# EAGLE board module (EAGLE 9.3.0)
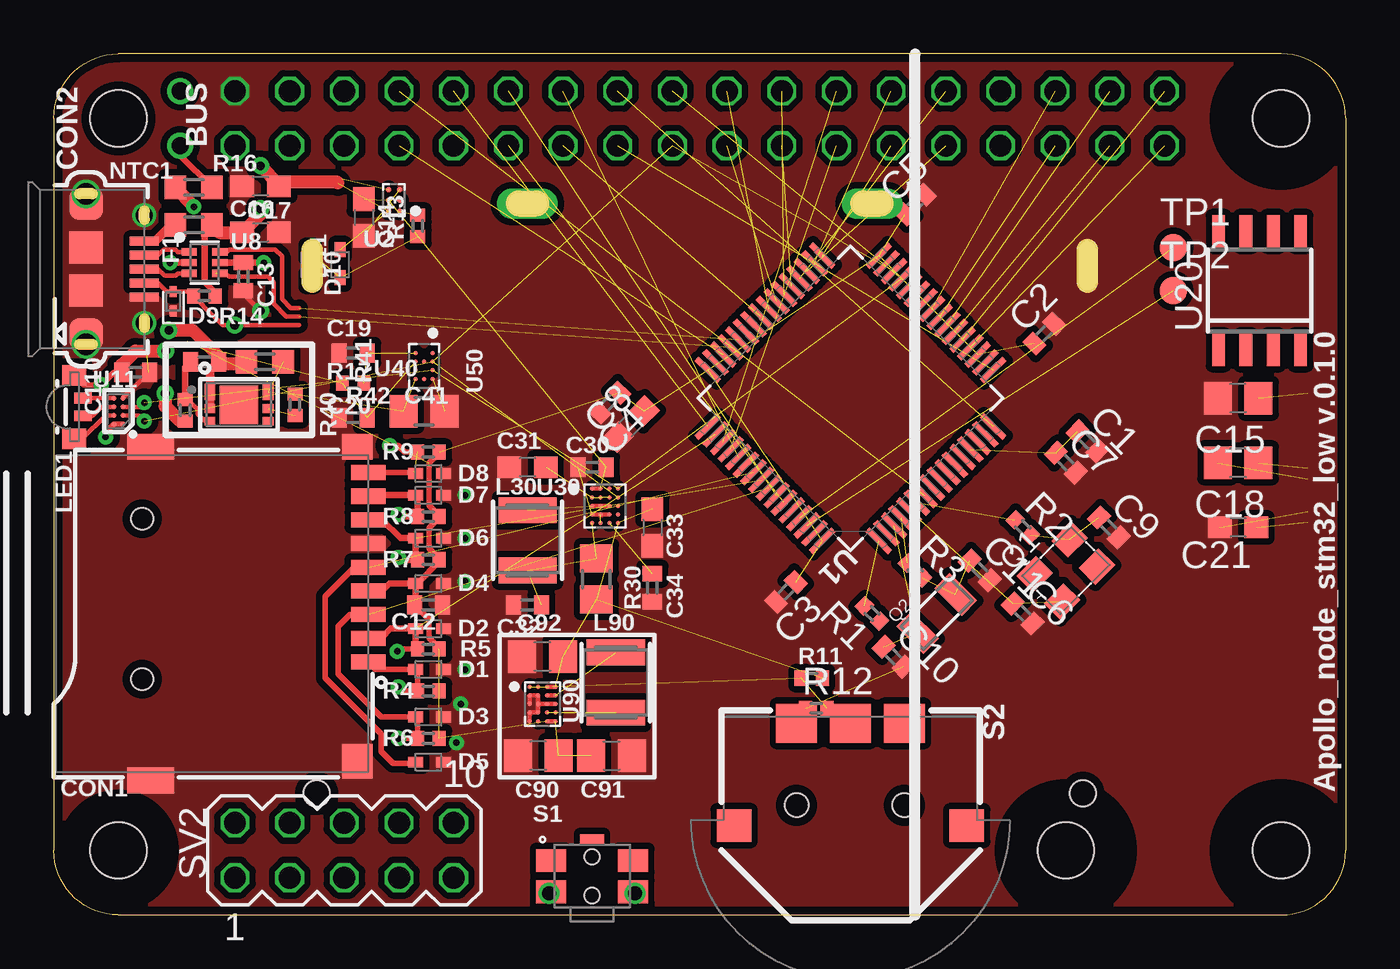
[diagram p0: board, top side]
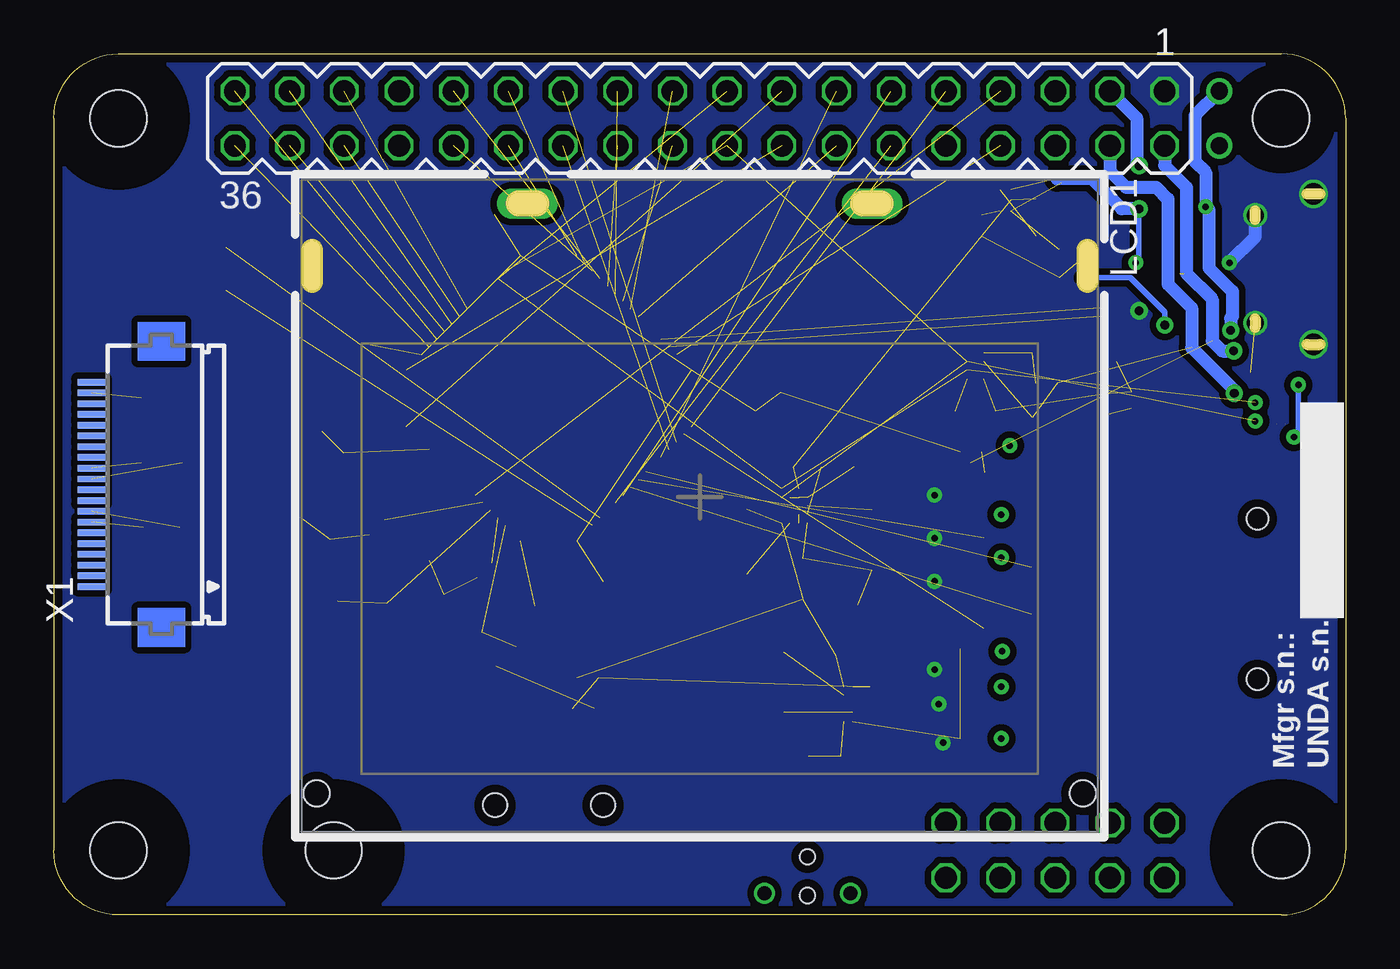
[diagram p1: board, bottom side, seen from below]

Size 60 x 40 mm. Coordinates in mm from the lower left corner, seen from the top.
Outline: 3,0 57,0 arc90 60,3 60,37 arc90 57,40 3,40 arc90 0,37 0,3 arc90 3,0
Copper layers (1*16): Top 0.035mm / dielectric 1mm / Bottom 0.035mm
Design rules "default *": minimum track width 0.2mm, minimum drill 0.3mm, track to track 0.16mm, track to pad 0.16mm, pad to pad 0.16mm, via to via 0.16mm, smd to smd 6mil, copper to edge 0.4mm, drill to drill 0.2mm, minimum pad ring 0.16mm, minimum via ring 0.2mm, stop-mask expansion 0.1mm, vias tented up to drill 0.6mm, thermal gap 10mil
Holes 2.6 mm at 57,3 3,37 3,3 57,37 47,3
tRestrict: area 54,0 to 60,6; area 0.5,0.5 to 5.5,5.5; area 54,34 to 60,40; area 44,0 to 50,6
bRestrict: area 54,0 to 60,6; area 0.8,34.8 to 5.2,39.2; area 0,0 to 6,6; area 54,34 to 60,40; area 44,0 to 50,6

## Footprints (pad centres in the part's own frame; a part is rotated, then mirrored left to right if it is on the bottom)
MA18-2 = drill 1.016 octagon: 1 -21.59,-1.27; 2 -21.59,1.27; 3 -19.05,-1.27; 4 -19.05,1.27; 5 -16.51,-1.27; 6 -16.51,1.27; 7 -13.97,-1.27; 8 -13.97,1.27; 9 -11.43,-1.27; 10 -11.43,1.27; 11 -8.89,-1.27; 12 -8.89,1.27; 13 -6.35,-1.27; 14 -6.35,1.27; 15 -3.81,-1.27; 16 -3.81,1.27; 17 -1.27,-1.27; 18 -1.27,1.27; 19 1.27,-1.27; 20 1.27,1.27; 21 3.81,-1.27; 22 3.81,1.27; 23 6.35,-1.27; 24 6.35,1.27; 25 8.89,-1.27; 26 8.89,1.27; 27 11.43,-1.27; 28 11.43,1.27; 29 13.97,-1.27; 30 13.97,1.27; 31 16.51,-1.27; 32 16.51,1.27; 33 19.05,-1.27; 34 19.05,1.27; 35 21.59,-1.27; 36 21.59,1.27
C0402 = smd 0.7 x 0.9: 1 -0.65,0; 2 0.65,0
C0603 = smd 1.1 x 1: 1 -0.85,0; 2 0.85,0
C0805 = smd 1.3 x 1.5: 1 -0.95,0; 2 0.95,0
112J = smd 1.2 x 1.4: GND1 -7.75,-0.5 | smd 1.2 x 2.2: GND2 -7.75,-10.1; GND3 7.75,-10.1 | smd 1.6 x 1.4: GND4 6.85,-0.5 | smd 0.7 x 1.6: P$1 2.25,0; P$2 1.15,0; P$3 0.05,0; P$4 -1.05,0; P$5 -2.15,0; P$6 -3.25,0; P$7 -4.35,0; P$8 -5.45,0; P$13 -6.55,0 | hole 1: -4.4,-10.5; 3.05,-10.5
10118194 = smd 0.4 x 1.35: 1 -1.3,2.7; 2 -0.65,2.7; 3 0,2.7; 4 0.65,2.7; 5 1.3,2.7 | drill 0.8: SH1 -2.5,2.7; SH2 2.5,2.7 | drill 1: SH3 -3.5,0; SH8 3.5,0 | smd 1.5 x 1.55: SH4 -3.05,0; SH5 -1,0; SH6 1,0; SH7 3.05,0
SOD523 = smd 0.7 x 0.5: A 0.7,0; C -0.6,0
SOD1006X40 = smd 0.495 x 0.32: 1 -0.453,0; 2 0.453,0
R0603 = smd 1 x 1.1: 1 -0.85,0; 2 0.85,0
L3230M = smd 1.2 x 2.7: 1 -1.4,0; 2 1.4,0
DEM128064PFGH-PW = drill 1.1 long: A -8,-14.05; K 8,-14.05 | hole 1.2: -17.8,13.35; 17.8,13.35
321015RGB = smd 0.5 x 0.8: 1 -0.415,0.4; 4 0.415,0.4 | smd 0.95 x 1.1: 2 -1.475,0; 3 1.475,0
3.2X2.5_KX-7 = smd 1.3 x 1.1: 1 -1.15,-0.9; 2 1.15,-0.9; 3 1.15,0.9; 4 -1.15,0.9
3.2X1.5 = smd 1 x 1.8: 1 -1.25,0; 2 1.25,0
R0402 = smd 0.6 x 0.7: 1 -0.5,0; 2 0.5,0
R0805 = smd 1.3 x 1.5: 1 -0.95,0; 2 0.95,0
SW_PTS840GMSMTRLFS = smd 1.4 x 1.05: 1 -1.9,0.725; 2 1.9,0.725; 3 -1.9,-0.725; 4 1.9,-0.725 | smd 1.1 x 0.5: 5 0,1.7 | drill 0.65 pad 0.7: P$1 -2,-0.8; P$2 2,-0.8 | hole 0.7: 0,-0.9; 0,0.9
MCPL3-AC-V = smd 1.9 x 1.8: 1 -2.5,-0.9; 2 0,-0.9; 3 2.5,-0.9 | smd 1.6 x 1.5: 4 5.4,3.85; 5 -5.4,3.85 | hole 1.1: -2.5,2.9; 2.5,2.9
MA05-2 = drill 1.016 octagon: 1 -5.08,-1.27; 2 -5.08,1.27; 3 -2.54,-1.27; 4 -2.54,1.27; 5 0,-1.27; 6 0,1.27; 7 2.54,-1.27; 8 2.54,1.27; 9 5.08,-1.27; 10 5.08,1.27
B1,27 = smd 1.27 x 1.27: TP 0,0
QFP50P1200X1200X160-64N = smd 1.473 x 0.279: 1 -5.613,3.759; 2 -5.613,3.251; 3 -5.613,2.743; 4 -5.613,2.261; 5 -5.613,1.753; 6 -5.613,1.245; 7 -5.613,0.762; 8 -5.613,0.254; 9 -5.613,-0.254; 10 -5.613,-0.762; 11 -5.613,-1.245; 12 -5.613,-1.753; 13 -5.613,-2.261; 14 -5.613,-2.743; 15 -5.613,-3.251; 16 -5.613,-3.759; 33 5.613,-3.759; 34 5.613,-3.251; 35 5.613,-2.743; 36 5.613,-2.261; 37 5.613,-1.753; 38 5.613,-1.245; 39 5.613,-0.762; 40 5.613,-0.254; 41 5.613,0.254; 42 5.613,0.762; 43 5.613,1.245; 44 5.613,1.753; 45 5.613,2.261; 46 5.613,2.743; 47 5.613,3.251; 48 5.613,3.759 | smd 0.279 x 1.473: 17 -3.759,-5.613; 18 -3.251,-5.613; 19 -2.743,-5.613; 20 -2.261,-5.613; 21 -1.753,-5.613; 22 -1.245,-5.613; 23 -0.762,-5.613; 24 -0.254,-5.613; 25 0.254,-5.613; 26 0.762,-5.613; 27 1.245,-5.613; 28 1.753,-5.613; 29 2.261,-5.613; 30 2.743,-5.613; 31 3.251,-5.613; 32 3.759,-5.613; 49 3.759,5.613; 50 3.251,5.613; 51 2.743,5.613; 52 2.261,5.613; 53 1.753,5.613; 54 1.245,5.613; 55 0.762,5.613; 56 0.254,5.613; 57 -0.254,5.613; 58 -0.762,5.613; 59 -1.245,5.613; 60 -1.753,5.613; 61 -2.261,5.613; 62 -2.743,5.613; 63 -3.251,5.613; 64 -3.759,5.613
BGA6C50P2X3_146X96X60 = smd 0.25 x 0.25: A1 -0.25,0.5; A2 0.25,0.5; B1 -0.25,0; B2 0.25,0; C1 -0.25,-0.5; C2 0.25,-0.5
SOTFL50P160X60-6 = smd 0.71 x 0.337: 1 -0.71,0.5; 2 -0.71,0; 3 -0.71,-0.5; 4 0.71,-0.5; 5 0.71,0; 6 0.71,0.5
BGA8C40P2X4_99X159X42 = smd 0.24 x 0.24: A1 -0.2,0.6; A2 0.2,0.6; B1 -0.2,0.2; B2 0.2,0.2; C1 -0.2,-0.2; C2 0.2,-0.2; D1 -0.2,-0.6; D2 0.2,-0.6
SOIC8 = smd 0.6 x 1.5: 1 -1.905,-2.75; 2 -0.635,-2.75; 3 0.635,-2.75; 4 1.905,-2.75; 5 1.905,2.75; 6 0.635,2.75; 7 -0.635,2.75; 8 -1.905,2.75
BGA20C40P4X5_196X187X55 = smd 0.2 x 0.2: A1 -0.6,0.8; A2 -0.2,0.8; A3 0.2,0.8; A4 0.6,0.8; B1 -0.6,0.4; B2 -0.2,0.4; B3 0.2,0.4; B4 0.6,0.4; C1 -0.6,0; C2 -0.2,0; C3 0.2,0; C4 0.6,0; D1 -0.6,-0.4; D2 -0.2,-0.4; D3 0.2,-0.4; D4 0.6,-0.4; E1 -0.6,-0.8; E2 -0.2,-0.8; E3 0.2,-0.8; E4 0.6,-0.8
DFN200X300X60-7N = smd 0.5 x 0.75: 1 -1.35,0.6; 6 1.35,0.6 | smd 0.5 x 0.4: 2 -1.35,-0.175; 3 -1.35,-0.775; 4 1.35,-0.775; 5 1.35,-0.175 | smd 1.8 x 1.8: 7 0,0
BGA12C40P4X3_137X201X65 = smd 0.2 x 0.2: A1 0.4,0.6; A3 -0.4,0.6; B1 0.4,0.2; B2 0,0.2; B3 -0.4,0.2; C1 0.4,-0.2; C3 -0.4,-0.2; D1 0.4,-0.6; D2 0,-0.6; D3 -0.4,-0.6
BGA20C40P4X5_201X161X60 = smd 0.2 x 0.2: A1 -0.6,0.8; A2 -0.2,0.8; A3 0.2,0.8; A4 0.6,0.8; B1 -0.6,0.4; B2 -0.2,0.4; B3 0.2,0.4; B4 0.6,0.4; C1 -0.6,0; C2 -0.2,0; C3 0.2,0; C4 0.6,0; D1 -0.6,-0.4; D2 -0.2,-0.4; D3 0.2,-0.4; D4 0.6,-0.4; E1 -0.6,-0.8; E2 -0.2,-0.8; E3 0.2,-0.8; E4 0.6,-0.8
FH12-20S-0.5SH = smd 0.3 x 1.3: 1 -4.75,3.25; 2 -4.25,3.25; 3 -3.75,3.25; 4 -3.25,3.25; 5 -2.75,3.25; 6 -2.25,3.25; 7 -1.75,3.25; 8 -1.25,3.25; 9 -0.75,3.25; 10 -0.25,3.25; 11 0.25,3.25; 12 0.75,3.25; 13 1.25,3.25; 14 1.75,3.25; 15 2.25,3.25; 16 2.75,3.25; 17 3.25,3.25; 18 3.75,3.25; 19 4.25,3.25; 20 4.75,3.25

## Placement (x,y rotation side)
BUS  [MA18-2]  30,37 180 bottom
C1  100nF  [C0402]  48,22 315 top
C2  100nF  [C0402]  46,27 45 top
C3  100nF  [C0402]  34,15 225 top
C4  100nF  [C0402]  25.8,23.8 225 top
C5  100nF  [C0402]  40,33 45 top
C6  [C0402]  45,14 315 top
C7  1uF  [C0402]  47,21 315 top
C8  10uF  [C0603]  26.8,22.8 225 top
C9  [C0402]  49,18 315 top
C10  [C0402]  39,12 315 top
C11  [C0402]  43,16 315 top
C12  [C0402]  17.4,14.4 0 top
C13  100nF  [C0402]  8.8,29.65 270 top
C14  4.7uF  [C0603]  14.4,32.4 270 top
C15  1uF  [C0805]  55,24 180 top
C16  4.7uF  [C0603]  9.6,33.85 180 top
C17  4.7uF  [C0603]  9.6,31.7 0 top
C18  1uF  [C0805]  55,21 180 top
C19  [C0402]  13.9,26.1 180 top
C20  [C0402]  13.9,23.1 180 top
C21  1uF  [C0603]  55,18 180 top
C30  1uF  [C0402]  25,20.8 180 top
C31  4.7uF  [C0603]  22,20.8 180 top
C32  100nF  [C0402]  22,14.4 180 top
C33  10uF  [C0603]  27.8,18 270 top
C34  1uF  [C0402]  27.8,15.2 270 top
C41  100nF  [C0402]  7,25.7 0 top
C90  47uF  [C0805]  22.5,7.4 180 top
C91  47uF  [C0805]  25.9,7.4 0 top
C92  [C0805]  22.7,12 180 top
C110  100nF  [C0402]  3.8,25.2 0 top
CON1  [112J]  14.6,14 270 top
CON2  [10118194]  1.5,30 270 top
D1  [SOD523]  17.4,11.4 0 top
D2  [SOD523]  17.4,13.3 0 top
D3  [SOD523]  17.4,9.2 0 top
D4  [SOD523]  17.4,15.4 0 top
D5  [SOD523]  17.4,7.1 0 top
D6  [SOD523]  17.4,17.5 0 top
D7  [SOD523]  17.4,19.5 0 top
D8  [SOD523]  17.4,20.5 0 top
D9  [SOD1006X40]  5.55,28.5 90 top
D10  [SOD523]  11.9,30.2 270 top
D11  [SOD523]  13.3,30.2 90 top
F1  [R0603]  6.5,32.05 0 top
L30  1uH  [L3230M]  22,17.4 270 top
L90  1uH  [L3230M]  26.1,10.8 270 top
LCD1  [DEM128064PFGH-PW]  30,19 180 bottom
LED1  [321015RGB]  0.95,23.6 270 top
NTC1  [R0603]  6.5,33.8 0 top
Q1  16MHz  [3.2X2.5_KX-7]  47,16 45 top
Q2  32765Hz  [3.2X1.5]  41,14 45 top
R1  [R0402]  38,14 135 top
R2  [R0402]  45,18 315 top
R3  [R0402]  40,16 315 top
R4  [R0402]  17.4,10.4 0 top
R5  [R0402]  17.4,12.35 0 top
R6  [R0402]  17.4,8.2 0 top
R7  [R0402]  17.4,16.5 0 top
R8  [R0402]  17.4,18.5 0 top
R9  [R0402]  17.4,21.5 0 top
R11  [R0402]  35.2,11 0 top
R12  [R0402]  35.4,9.6 0 top
R13  100k  [R0402]  16.9,32 90 top
R14  [R0402]  7,28.75 180 top
R16  [R0805]  17.2,23.4 180 top
R17  [R0402]  13.9,24.7 0 top
R30  68mOhm  [R0805]  25.2,15.6 270 top
R40  330  [R0402]  6.1,23.45 270 top
R41  2.7k  [R0402]  11.2,23.7 270 top
R42  [R0603]  9.8,25.7 0 top
S1  PTS840_GM_SMTR_LFS  [SW_PTS840GMSMTRLFS]  25,1.8 0 top
S2  MCPL3-AC-V  [MCPL3-AC-V]  37,8 180 top
SV2  [MA05-2]  13.49,3 0 top
TP1  TPB1,27  [B1,27]  52,31 0 top
TP2  TPB1,27  [B1,27]  52,29 0 top
U1  STM32F103RDT6  [QFP50P1200X1200X160-64N]  37,24 135 top
U2  [BGA6C50P2X3_146X96X60]  15.8,33.2 180 top
U8  [SOTFL50P160X60-6]  7,30.3 0 top
U11  IS31FL3194-CLS2-TR  [BGA8C40P2X4_99X159X42]  3,23.4 180 top
U20  [SOIC8]  56,29 0 top
U30  [BGA20C40P4X5_196X187X55]  25.6,19 0 top
U40  AP9211SA-AK-HAC-7  [DFN200X300X60-7N]  8.6,23.7 0 top
U50  [BGA12C40P4X3_137X201X65]  17.2,25.5 0 top
U90  FAN49100  [BGA20C40P4X5_201X161X60]  22.7,9.8 0 top
X1  FH12-20S-0.5SH  [FH12-20S-0.5SH]  55,20 90 bottom

## Library data of the parts
BUS SV2 = con-lstb; OC_FARNELL: unknown; OC_NEWARK: unknown
C1-C21 C30-C34 C41 C90-C92 C110 = rcl; SPICEPREFIX: C
CON1 = parts-attend
CON2 = parts-amphenol
D1-D8 D10 D11 = diode
D9 U2 U30 U90 = parts-onsemi
F1 NTC1 R1-R9 R11-R14 R16 R17 R30 R40-R42 = rcl; SPICEPREFIX: R
L30 L90 = parts-ferrocore
LCD1 = parts-display-elektronic
LED1 = parts-optosupply
Q1 Q2 = crystal-geyer_V1_0
S1 = parts_ck; AVAILABILITY: Unavailable; DESCRIPTION: Switch Tactile N.O. SPST Button Gull Wing 0.05A 12VDC 100000Cycle 1.57N SMD T/R; MF: C&K; MP: PTS840 GM SMTR LFS; PACKAGE: None; PRICE: None
S2 = multicomp; ARROW_PART_NUMBER: MCPL3-AC-V; DESCRIPTION: MULTICOMP - MCPL3-AC-V - NAVIGATION SWITCH, 3WAY, SMD; HEIGHT: mm; MANUFACTURER_NAME: MULTICOMP; MANUFACTURER_PART_NUMBER: MCPL3-AC-V
TP1 TP2 = testpad
U1 = parts-st; AVAILABILITY: Unavailable; DESCRIPTION: Mainstream Performance line, ARM Cortex-M3 MCU with 384 Kbytes Flash, 72 MHz CPU, motor control, USB and CAN; MF: STMicroelectronics; MP: STM32F103RDT6; PACKAGE: LQFP-64 STMicroelectronics; PRICE: None
U8 U50 = parts-st
U11 = parts-issi; DESCRIPTION: LED Lighting Drivers 3-Channel Fun LED Driver; HEIGHT: 0.422mm; MANUFACTURER_NAME: Integrated Silicon Solution Inc.; MANUFACTURER_PART_NUMBER: IS31FL3194-CLS2-TR; MOUSER_PART_NUMBER: 870-IS31FL3194CLS2TR
U20 = parts-microchip
U40 = parts-diodes; AVAILABILITY: Unavailable; DESCRIPTION: Battery Protection Li-Ion Packs 2.4V to 4.25V 6-Pin UDFN T/R; MF: Diodes Inc.; MP: AP9211SA-AK-HAC-7; PACKAGE: UDFN-6 Diodes Inc.; PRICE: None
X1 = con-hirose; MPN: FH12-20S-0.5SH(55); OC_FARNELL: 1324549; OC_NEWARK: 34M6166

## Nets
!LCD_CS: X1.2
!LCD_RES: X1.3
BAT_MINUS: C41.2 NTC1.1 R42.1 U40.1 U40.2
BAT_MINUS_COND: R16.2 R41.1 R42.2 U40.6 U50.D3
BAT_NTC: NTC1.2
BOOT1: U1.28
BUS_CAN_RX: BUS.30
BUS_CAN_TX: BUS.29
BUS_CAPE_EN1: BUS.13 U1.53
BUS_CAPE_EN2: BUS.14 U1.41
BUS_GPIO0: BUS.19 U1.40
BUS_GPIO1: BUS.20 U1.39
BUS_GPIO2: BUS.21 U1.38
BUS_GPIO3: BUS.22 U1.37
BUS_I2C_SCL: BUS.17 U1.29 U11.C1 U30.A4 U50.C1
BUS_I2C_SDA: BUS.18 U1.30 U11.B1 U30.B4 U50.B1
BUS_NRST: BUS.7 U1.7
BUS_SPI_CLK: BUS.25 U1.34
BUS_SPI_CS: BUS.26 U1.33
BUS_SPI_MISO: BUS.28 U1.35
BUS_SPI_MOSI: BUS.27 U1.36
BUS_SWD_CLK: BUS.9 U1.49
BUS_SWD_DATA: BUS.8 U1.46
BUS_SWD_EXTRA: BUS.10
BUS_UART0_RXD: BUS.12 U1.59
BUS_UART0_TXD: BUS.11 U1.58
BUS_UART1_RXD: BUS.16 U1.17
BUS_UART1_TXD: BUS.15 U1.16
BUS_UART2_RXD: BUS.24 U1.52
BUS_UART2_TXD: BUS.23 U1.51
BUS_VBAT: BUS.4 C20.1 R17.1 R40.2 U50.B3
BUS_VEXT: BUS.3 C16.1 D11.A U2.A2
CAN_RX: TP1.TP U1.61
CAN_TX: TP2.TP U1.62
CD: U50.B2
EXP: U40.7
GND: BUS.1 C1.2 C2.2 C3.2 C4.2 C5.2 C6.2 C7.2 C8.2 C9.2 C10.2 C11.2 C12.2 C13.2 C14.2 C15.2 C16.2 C17.2 C19.2 C20.2 C21.2 C30.2 C31.2 C32.2 C33.2 C34.2 C90.2 C91.2 C92.2 C110.2 CON1.GND1 CON1.GND2 CON1.GND3 CON1.GND4 CON1.P$6 CON2.5 CON2.SH1 CON2.SH2 CON2.SH3 CON2.SH4 CON2.SH5 CON2.SH6 CON2.SH7 CON2.SH8 D1.A D2.A D3.A D4.A D5.A D6.A D7.A D8.A D9.1 R12.1 R16.1 U2.C1 U8.2 U11.D1 U30.D1 U30.D2 U30.D3 U30.E2 U50.D1 U90.B1 U90.B2 U90.C1 U90.C2 U90.C3 U90.C4 U90.D1 U90.D2 U90.E1 X1.8
GPIO31: BUS.31 U1.25
GPIO32: BUS.32 U1.24
GPIO33: BUS.33 U1.23
GPIO34: BUS.34 U1.22
GPIO35: BUS.35 U1.21
GPIO36: BUS.36 U1.20
HSE_IN: C6.1 Q1.1 U1.5
HSE_OUT: R2.1 U1.6
LCD_A0: X1.4
LCD_SCL: X1.5
LCD_SI: X1.6
LED_BLUE: LED1.1 U11.D2
LED_GREEN: LED1.4 U11.C2
LED_RED: LED1.3 U11.B2
LSE_IN: C10.1 Q2.1 U1.3
LSE_OUT: R3.1 U1.4
N$1: R1.2 U1.1
N$2: C9.1 Q1.3 R2.2
N$3: C41.1 R40.1 U40.3
N$4: C11.1 Q2.2 R3.2
N$5: CON2.1 F1.1
N$6: U2.B1
N$8: U1.26
N$10: U1.27
N$11: D10.C D11.C R13.1
N$12: R13.2 U2.A1
N$15: U50.A1
N$16: U50.C3
N$17: R41.2 U40.5
N$18: L30.1 U30.C1 U30.C2 U30.C3
N$19: C31.1 U30.B1 U30.B2 U30.B3
N$20: L90.2 U90.D3 U90.D4
N$21: L90.1 U90.B3 U90.B4
N$22: C19.1 R17.2 U50.A3
N$23: C34.1 U30.E3
N$24: R11.1 R12.2 U90.A2
N$25: U90.E2
N$27: C21.1 X1.7
N$28: U30.D4
N$29: U30.C4
N$31: C18.1 X1.12
N$32: C18.2 X1.11
N$33: C15.1 X1.19
SDC_CLK: CON1.P$5 D5.C U1.55
SDC_CS: CON1.P$2 D2.C R5.1 U1.50
SDC_DAT1: CON1.P$8 D7.C R8.1
SDC_DAT2: CON1.P$1 D1.C R4.1
SDC_DET: CON1.P$13 D8.C R9.1
SDC_MISO: CON1.P$7 D6.C R7.1 U1.56
SDC_MOSI: CON1.P$3 D3.C R6.1 U1.57
SW: C32.1 L30.2 R30.1 U30.E1
USB_DM: U1.44 U8.6
USB_DM_RAW: CON2.2 U8.1
USB_DP: U1.45 U8.4
USB_DP_RAW: CON2.3 U8.3
USB_FS_ID: U1.43
USB_ID: CON2.4 D9.2 D10.A R14.2
USB_VBUS: U1.42
VBAT_PLUS: C33.1 C92.1 R11.2 R30.2 U30.E4 U90.A1 U90.A3 U90.A4
VBUS_USB: C13.1 C17.1 F1.2 R14.1 U2.C2 U8.5
VDDA: C1.1 C7.1 U1.13
VIN_PS: C14.1 C30.1 U2.B2 U30.A1 U30.A2
VSYS: BUS.2 C2.1 C3.1 C4.1 C5.1 C8.1 C12.1 C90.1 C91.1 C110.1 CON1.P$4 D4.C LED1.2 R4.2 R5.2 R6.2 R7.2 R8.2 R9.2 U1.19 U1.32 U1.48 U1.64 U11.A1 U11.A2 U90.E3 U90.E4

## Tracks (layer width: path | path; a pad name or v marks a point on that pad's centre or on a via)
BAT_MINUS  (via drill 0.3, 0.4, 0.8)
  Top 0.4: C41.2 7.25,25.3 U40.1 U40.2
  Top 0.6: v6.5,32.9 5.65,33.75 NTC1.1 | R42.1 8.85,25.6 8.4,25.6 7.75,25.6 C41.2 7.65,25.95 6.44,27.16 v5.34,27.16
  Bottom 0.6: v5.87,38.27 7,37.14 7,35 6.5,34.5 v6.5,32.9 | v6.5,32.9 6.5,32.85 | v6.5,32.9 6.35,32.75 6.35,30.05 5.26,28.96 5.26,27.8 5.34,27.72 v5.34,27.16
BAT_MINUS_COND  (4 unrouted)
BAT_NTC  (via drill 0.8)
  Top 0.25: NTC1.2 5.87,35.28 v5.87,35.73
BUS_CAPE_EN1  (1 unrouted)
BUS_CAPE_EN2  (1 unrouted)
BUS_GPIO0  (1 unrouted)
BUS_GPIO1  (1 unrouted)
BUS_GPIO2  (1 unrouted)
BUS_GPIO3  (1 unrouted)
BUS_I2C_SCL  (via drill 0.3)  (4 unrouted)
  Top 0.2: U11.C1 4,23.6 v4.2,23.8
BUS_I2C_SDA  (via drill 0.3)  (4 unrouted)
  Top 0.2: U11.B1 3.94,23.2 3.95,23.19 v4.2,22.94
BUS_NRST  (1 unrouted)
BUS_SPI_CLK  (1 unrouted)
BUS_SPI_CS  (1 unrouted)
BUS_SPI_MISO  (1 unrouted)
BUS_SPI_MOSI  (1 unrouted)
BUS_SWD_CLK  (1 unrouted)
BUS_SWD_DATA  (1 unrouted)
BUS_UART0_RXD  (1 unrouted)
BUS_UART0_TXD  (1 unrouted)
BUS_UART1_RXD  (1 unrouted)
BUS_UART1_TXD  (1 unrouted)
BUS_UART2_RXD  (1 unrouted)
BUS_UART2_TXD  (1 unrouted)
BUS_VBAT  (via drill 0.4)  (3 unrouted)
  Top 0.6: R40.2 5.85,22.95 5.17,23.63 v5.17,24.23
  Bottom 0.6: BUS.4 10.95,34.55 10.2,33.8 8.8,33.8 8.25,33.25 8.25,29.3 7.15,28.2 7.15,26.35 5.17,24.37 v5.17,24.23
BUS_VEXT  (via drill 0.4)  (2 unrouted)
  Top 0.6: v9.6,34.8 10.45,33.95 C16.1 10.66,34.06 13.14,34.06 13.2,34
  Bottom 0.6: BUS.3 9.7,37.02 9.7,34.9 v9.6,34.8
CAN_RX  (1 unrouted)
CAN_TX  (1 unrouted)
GND  (via drill 0.3, 0.4)  (7 unrouted)
  Top 0.2: U90.E1 U90.D1 U90.D2 U90.C2 | U90.C4 U90.C3 U90.C2 | U90.C1 U90.B1 U90.B2 U90.C2 | U30.D3 U30.D2 U30.D1 | U11.D1 4.4,25.2 C110.2 | C13.2 8.8,28.86 v9.6,28.06
  Top 0.3: v5.4,30.3 U8.2
  Bottom 0.6: v5.4,30.3 4.2,31.5 CON2.SH1
  other vias: 19.1,19.5 19.1,17.5 19.1,15.5 19.1,11.4 18.9,9.8 18.7,8
  pour Bottom (isolate 0.3, rank 6, no thermals): -2,-2 -2,42 62,42 62,-2
  pour Top (isolate 0.3, no thermals): -4,-4 -4,44 64,44 64,-4
GPIO31  (1 unrouted)
GPIO32  (1 unrouted)
GPIO33  (1 unrouted)
GPIO34  (1 unrouted)
GPIO35  (1 unrouted)
GPIO36  (1 unrouted)
HSE_IN  (2 unrouted)
HSE_OUT  (1 unrouted)
LED_BLUE
  Top 0.2: U11.D2 2.79,24.02 LED1.1
LED_GREEN
  Top 0.2: LED1.4 1.78,23.18 2.2,23.6 U11.C2
LED_RED
  Top 0.2: 1.23,22.4 LED1.3 | LED1.3 1.31,22.12 LED1.3 | LED1.3 1.32,22.12 2.4,23.2 U11.B2
LSE_IN  (2 unrouted)
LSE_OUT  (1 unrouted)
N$1  (1 unrouted)
N$2  (2 unrouted)
N$3
  Top 0.2: R40.1 6.22,23.95 6.69,23.48 6.69,23.27 6.99,22.96 7.21,22.96 U40.3
  Top 0.3: R40.1 6.1,25.45 C41.1
N$4  (2 unrouted)
N$5
  Top 0.4: CON2.1 4.7,31.3 5.45,32.05 F1.1
N$11  (2 unrouted)
N$12  (1 unrouted)
N$17  (1 unrouted)
N$18  (1 unrouted)
  Top 0.2: U30.C3 U30.C2 U30.C1
N$19  (3 unrouted)
N$20  (2 unrouted)
N$21  (1 unrouted)
  Top 0.2: U90.B4 U90.B3
N$22  (2 unrouted)
N$23  (1 unrouted)
N$24  (2 unrouted)
N$27  (1 unrouted)
N$31  (1 unrouted)
N$32  (1 unrouted)
N$33  (1 unrouted)
SDC_CLK  (1 unrouted)
  Top 0.2: 16.85,7.05 D5.C
  Top 0.25: CON1.P$5 13.95,16.15 12.6,14.8 12.6,11 15.2,8.4 15.2,7.6 15.75,7.05 16.85,7.05
SDC_CS  (via drill 0.3)  (1 unrouted)
  Top 0.25: R5.1 16.05,12.35 v15.95,12.25
  Top 0.3: CON1.P$2 14.65,12.9 15.25,12.9 15.65,13.3 D2.C 16.8,12.45 R5.1
SDC_DAT1  (via drill 0.3)
  Top 0.3: CON1.P$8 14.65,19.5 D7.C 16.9,19.4 R8.1 16.1,18.5 v16,18.6
SDC_DAT2  (via drill 0.3)
  Top 0.25: CON1.P$1 14.95,11.4 D1.C 16.9,11.3 R4.1 16.2,10.4 v16,10.6
SDC_DET  (via drill 0.3)  (1 unrouted)
  Top 0.25: R9.1 16.3,21.5 16,21.8 v15.6,21.8 | CON1.P$13 16.75,20.55 D8.C
  Top 0.3: R9.1 16.8,21.6
SDC_MISO  (via drill 0.3)  (1 unrouted)
  Top 0.3: CON1.P$7 15.25,18.35 16.1,17.5 D6.C 16.8,16.6 R7.1 16.1,16.5 v16,16.6
SDC_MOSI  (via drill 0.3)  (1 unrouted)
  Top 0.25: CON1.P$3 13.75,13.95 13.2,13.4 13.2,11.2 15.2,9.2 D3.C 16.9,9.1 R6.1 v16,8.2
SW  (3 unrouted)
USB_DM  (1 unrouted)
  Top 0.2: U8.6 8.03,30.8 8.14,30.91 10.29,30.91 10.6,30.6 10.6,28.6 11,28.2 11.4,28.2
USB_DM_RAW
  Top 0.2: CON2.2 4.83,30.65 5.09,30.91 5.65,30.91 5.76,30.8 U8.1
USB_DP  (2 unrouted)
  Top 0.2: 7.51,29.8 7.98,29.8 8.14,29.64 9.96,29.64 10.2,29.4 10.2,28.4 10.8,27.8 11.4,27.8
USB_DP_RAW
  Top 0.2: CON2.3 4.83,30 5.14,29.69 5.65,29.69 5.76,29.8 U8.3
USB_ID  (via drill 0.4)  (1 unrouted)
  Top 0.2: CON2.4 4.85,29.35 5.25,28.95 D9.2 6.3,28.95 R14.2 6.94,28.31 6.94,28.29 7.83,27.4 v8.4,27.4 11.4,27.4
  Top 0.25: R14.2 6.5,28.55
  Bottom 0.25: 12.2,29.6 10,29.6 8.4,28 v8.4,27.4
VBAT_PLUS  (6 unrouted)
  Top 0.2: U90.A4 U90.A3
VBUS_USB  (via drill 0.3, 0.4)  (1 unrouted)
  Top 0.3: F1.2 7.35,31.95 7,31.6 7,29.4 7.5,28.9 R14.1 | U8.5 C13.1 v9.75,30.3
  Top 0.6: F1.2 7.7,31.7 C17.1 9.44,32.39 9.6,32.55 v9.6,32.8
  Bottom 0.25: v9.75,30.3 9.6,30.45 v9.6,32.8
  Bottom 0.6: v9.6,32.8 10.4,32.8 11.8,34.2 13.4,34.2
VDDA  (2 unrouted)
VIN_PS  (3 unrouted)
  Top 0.2: U30.A2 U30.A1
VSYS  (via drill 0.3, 0.4)  (17 unrouted)
  Top 0.2: U90.E4 U90.E3
  Top 0.25: 1.23,24.8 LED1.2 1.4,24.62 v2.2,24.62 2.77,25.2 C110.1 | v2.4,22.2 2.4,22.4 U11.A2 U11.A1 | R5.2 17.9,12.4 17.43,12.87 17.43,13.71 C12.1 | 17.9,21.3 R9.2 17.9,21.45 17.43,20.98 17.43,19.02 17.9,18.55 R8.2 17.9,18.45 17.43,17.98 17.43,17.02 17.9,16.55 R7.2
  Top 0.3: D4.C 16.8,14.45 C12.1 | CON1.P$4 15.25,15.05 15.6,15.4 D4.C | D4.C 16.89,15.4 17.9,16.41 R7.2
  Top 0.6: C110.1 3.15,25.55 3.8,26.2 v5.2,26.2
  Bottom 0.25: v2.2,24.62 2.2,22.4 v2.4,22.2
  Bottom 0.6: BUS.2 8.41,34.81 7.4,33.8 7.4,29.8 6.2,28.6 6.2,26.66 5.74,26.2 v5.2,26.2

## Text on the board
tPlace: Apollo_node_stm32_low v.0.1.0
bPlace: UNDA s.n.: | Mfgr s.n.: